# EAGLE board AJH_as3340_panel_01 (EAGLE 9.6.2)
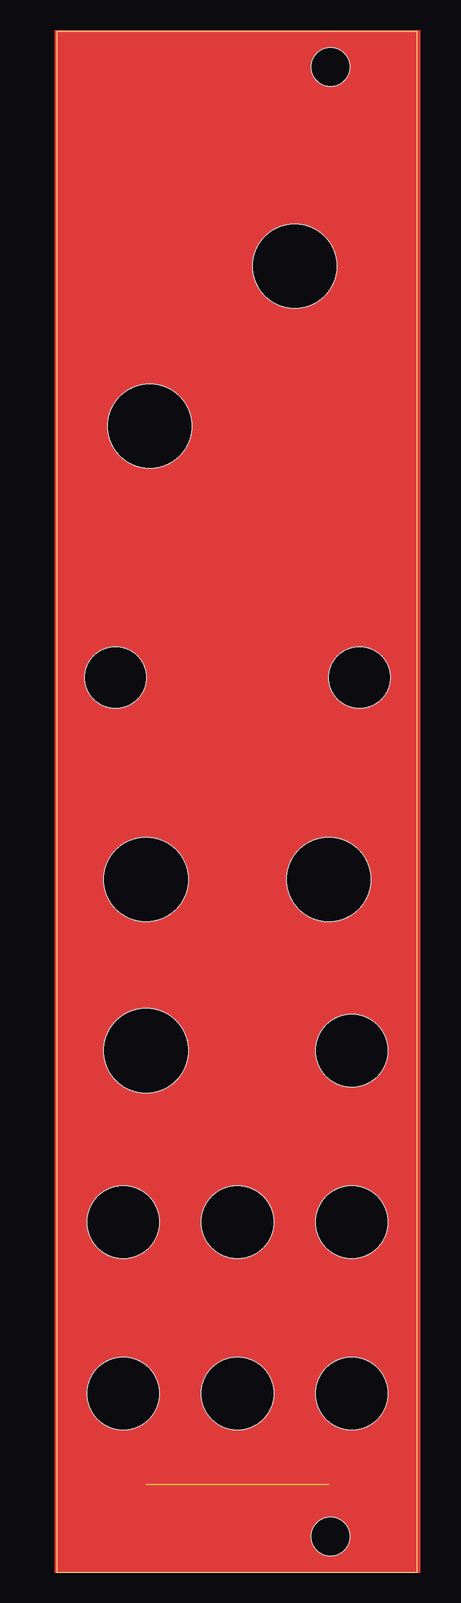
[diagram p0: board, top side]
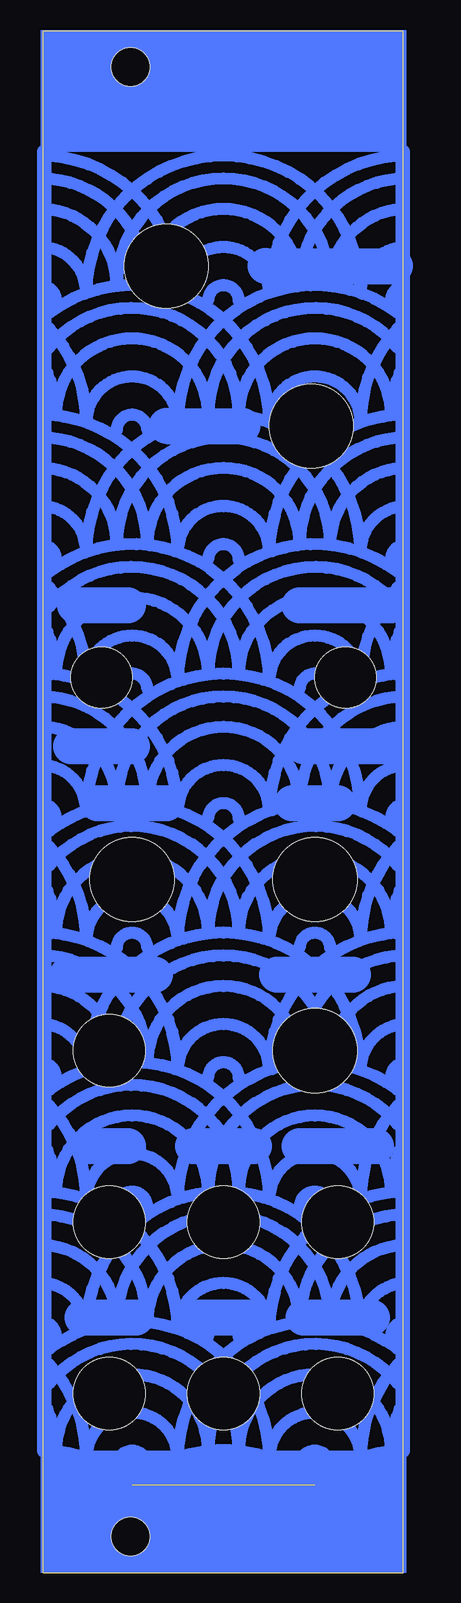
[diagram p1: board, bottom side, seen from below]

Size 30 x 128.5 mm. Coordinates in mm from the lower left corner, seen from the top.
Copper layers (1*16): Top 0.035mm / dielectric 1.5mm / Bottom 0.035mm
Design rules "default": minimum track width 6mil, minimum drill 0.35mm, track to track 6mil, track to pad 6mil, pad to pad 6mil, via to via 6mil, smd to smd 6mil, copper to edge 40mil, drill to drill 6mil, minimum pad ring 10mil, minimum via ring 8mil, stop-mask expansion 4mil, vias tented up to drill 0mil, thermal gap 10mil
Net classes: 0 default: width 0.203 mm, drill 0.203 mm, clearance 0.203 mm; 1 power: width 0.305 mm, drill 0.305 mm, clearance 0.305 mm to class 0, clearance 0.305 mm
Holes 7 mm at 19.76,108.9 7.7,95.57 22.62,57.78 7.38,57.78 7.38,43.5
Holes 5.1 mm at 25.16,74.61 4.84,74.61
Holes 6 mm at 24.52,43.5 15,29.21 24.52,29.21 5.47,29.21 24.52,14.92 15,14.92 5.47,14.92

## Footprints (pad centres in the part's own frame; a part is rotated, then mirrored left to right if it is on the bottom)
EURO_PANEL_6HP = hole 3.2: 7.5,125.5; 7.5,3

## Placement (x,y rotation side)
E$1  [EURO_PANEL_6HP]  30.24,0 0 bottom

## Library data of the parts
E$1 = eurohelper

## Tracks (layer width: path | path; a pad name or v marks a point on that pad's centre or on a via)
GND  (1 unrouted)
  Bottom 1: 0.08,10.16 arc-40 7.38,7.3 | 22.62,7.3 arc-40 29.92,10.16
  Bottom 1.2: 0.08,118.43 0.08,10.16 | 29.92,118.43 29.92,10.16
S$1
  Bottom 1: 18.81,106.68 arc-86 29.35,118.08
S$2
  Bottom 1: 21.35,107.31 arc-84 29.35,116.16
S$3
  Bottom 1: 23.89,107.31 arc-82 29.35,113.6
S$4
  Bottom 1: 26.43,95.89 arc-43 29.52,103.7
S$5
  Bottom 1: 28.97,96.52 arc-23 29.68,100
S$6
  Bottom 1: 18.81,85.09 arc-86 29.35,96.48
S$7
  Bottom 1: 23.89,85.72 arc-82 29.35,92.01
S$8
  Bottom 1: 26.43,74.3 arc-43 29.52,82.11
S$9
  Bottom 1: 28.97,74.93 arc-23 29.68,78.41
S$10
  Bottom 1: 21.35,85.72 arc-84 29.35,94.57
S$11
  Bottom 1: 11.19,95.89 arc-127 29.47,105.03
S$12
  Bottom 1: 26.43,106.68 arc-77 29.35,110.39
S$13
  Bottom 1: 0.65,118.08 arc-86 11.19,106.68
S$14
  Bottom 1: 0.65,116.16 arc-84 8.65,107.31
S$15
  Bottom 1: 0.65,113.6 arc-82 6.11,107.31
S$16
  Bottom 1: 3.57,106.68 arc-180 26.43,106.68
S$17
  Bottom 1: 6.11,107.31 arc-180 23.89,107.31
S$18
  Bottom 1: 8.65,107.31 arc-180 21.35,107.31
S$19
  Bottom 1: 11.19,106.68 arc-180 18.81,106.68
S$20
  Bottom 1: 13.73,106.05 arc-180 16.27,106.05
S$21
  Bottom 1: 13.73,96.52 arc-142 29.58,102.05
S$22
  Bottom 1: 0.32,100 arc-23 1.03,96.52
S$23
  Bottom 1: 0.48,103.7 arc-43 3.57,95.89
S$24
  Bottom 1: 0.65,110.39 arc-77 3.57,106.68
S$25
  Bottom 1: 0.65,94.57 arc-84 8.65,85.72
S$26
  Bottom 1: 0.65,92.01 arc-82 6.11,85.72
S$27
  Bottom 1: 0.65,88.8 arc-77 3.57,85.09
S$28
  Bottom 1: 0.48,82.11 arc-43 3.57,74.3
S$29
  Bottom 1: 0.32,78.41 arc-23 1.03,74.93
S$30
  Bottom 1: 0.65,96.48 arc-86 11.19,85.09
S$31
  Bottom 1: 0.53,105.03 arc-127 18.81,95.89
S$32
  Bottom 1: 0.58,107.01 arc-50 1.03,106.05
S$33
  Bottom 1: 28.97,106.05 arc-50 29.42,107.01
S$34
  Bottom 1: 26.43,85.09 arc-77 29.35,88.8
S$35
  Bottom 1: 28.97,84.45 arc-50 29.42,85.42
S$36
  Bottom 1: 11.19,74.3 arc-127 29.47,83.44
S$37
  Bottom 1: 13.73,74.93 arc-142 29.58,80.46
S$38
  Bottom 1: 18.81,63.5 arc-86 29.35,74.89
S$39
  Bottom 1: 21.35,64.14 arc-84 29.35,72.98
S$40
  Bottom 1: 23.89,64.14 arc-82 29.35,70.42
S$41
  Bottom 1: 26.43,63.5 arc-77 29.35,67.21
S$42
  Bottom 1: 26.43,52.7 arc-43 29.52,60.52
S$43
  Bottom 1: 28.97,53.34 arc-23 29.68,56.82
S$44
  Bottom 1: 18.81,41.91 arc-86 29.35,53.3
S$45
  Bottom 1: 23.89,42.55 arc-82 29.35,48.83
S$46
  Bottom 1: 26.43,41.91 arc-77 29.35,45.62
S$47
  Bottom 1: 28.97,31.75 arc-23 29.68,35.23
S$48
  Bottom 1: 26.43,31.11 arc-43 29.52,38.93
S$49
  Bottom 1: 21.35,42.55 arc-84 29.35,51.39
S$50
  Bottom 1: 11.19,52.7 arc-127 29.47,61.85
S$51
  Bottom 1: 13.73,53.34 arc-142 29.58,58.87
S$52
  Bottom 1: 28.97,62.87 arc-50 29.42,63.83
S$53
  Bottom 1: 11.19,31.11 arc-127 29.47,40.27
S$54
  Bottom 1: 23.89,20.95 arc-82 29.35,27.24
S$55
  Bottom 1: 26.43,20.32 arc-77 29.35,24.03
S$56
  Bottom 1: 26.43,9.53 arc-43 29.52,17.34
S$57
  Bottom 1: 28.97,10.16 arc-23 29.68,13.64
S$58
  Bottom 1: 21.35,20.95 arc-84 29.35,29.8
S$59
  Bottom 1: 18.81,20.32 arc-86 29.35,31.71
S$60
  Bottom 1: 13.73,31.75 arc-142 29.58,37.28
S$61
  Bottom 1: 28.97,41.27 arc-50 29.42,42.24
S$62
  Bottom 1: 11.19,9.53 arc-127 29.47,18.68
S$63
  Bottom 1: 13.73,10.16 arc-142 29.58,15.69
S$64
  Bottom 1: 28.97,19.68 arc-50 29.42,20.65
S$65
  Bottom 1: 21.35,8.89 arc-180 23.89,8.89
S$66
  Bottom 1: 18.81,9.53 arc-180 26.43,9.53
S$67
  Bottom 1: 16.27,10.16 arc-180 28.97,10.16
S$68
  Bottom 1: 1.03,10.16 arc-180 13.73,10.16
S$69
  Bottom 1: 0.42,15.69 arc-142 16.27,10.16
S$70
  Bottom 1: 0.53,18.68 arc-127 18.81,9.53
S$71
  Bottom 1: 0.65,27.24 arc-82 6.11,20.95
S$72
  Bottom 1: 6.11,20.95 arc-180 23.89,20.95
S$73
  Bottom 1: 1.03,31.75 arc-180 13.73,31.75
S$74
  Bottom 1: 11.19,20.32 arc-180 18.81,20.32
S$75
  Bottom 1: 13.73,19.68 arc-180 16.27,19.68
S$76
  Bottom 1: 3.57,9.53 arc-180 11.19,9.53
S$77
  Bottom 1: 6.11,8.89 arc-180 8.65,8.89
S$80
  Bottom 1: 7.38,7.3 arc-83 22.62,7.3
S$81
  Bottom 1: 16.27,31.75 arc-180 28.97,31.75
S$82
  Bottom 1: 18.81,31.11 arc-180 26.43,31.11
S$83
  Bottom 1: 21.35,30.48 arc-180 23.89,30.48
S$84
  Bottom 1: 0.65,51.39 arc-84 8.65,42.55
S$85
  Bottom 1: 3.57,41.91 arc-180 26.43,41.91
S$86
  Bottom 1: 6.11,42.55 arc-180 23.89,42.55
S$87
  Bottom 1: 8.65,42.55 arc-180 21.35,42.55
S$88
  Bottom 1: 11.19,41.91 arc-180 18.81,41.91
S$89
  Bottom 1: 0.42,80.46 arc-142 16.27,74.93
S$90
  Bottom 1: 11.19,85.09 arc-180 18.81,85.09
S$91
  Bottom 1: 8.65,85.72 arc-180 21.35,85.72
S$92
  Bottom 1: 6.11,85.72 arc-180 23.89,85.72
S$93
  Bottom 1: 18.81,95.89 arc-180 26.43,95.89
S$94
  Bottom 1: 21.35,95.25 arc-180 23.89,95.25
S$95
  Bottom 1: 16.27,96.52 arc-180 28.97,96.52
S$96
  Bottom 1: 1.03,96.52 arc-180 13.73,96.52
S$97
  Bottom 1: 0.42,102.05 arc-142 16.27,96.52
S$98
  Bottom 1: 3.57,95.89 arc-180 11.19,95.89
S$99
  Bottom 1: 6.11,95.25 arc-180 8.65,95.25
S$100
  Bottom 1: 3.57,85.09 arc-180 26.43,85.09
S$101
  Bottom 1: 13.73,84.45 arc-180 16.27,84.45
S$102
  Bottom 1: 1.03,74.93 arc-180 13.73,74.93
S$103
  Bottom 1: 3.57,74.3 arc-180 11.19,74.3
S$104
  Bottom 1: 6.11,73.66 arc-180 8.65,73.66
S$105
  Bottom 1: 3.57,63.5 arc-180 26.43,63.5
S$106
  Bottom 1: 6.11,64.14 arc-180 23.89,64.14
S$107
  Bottom 1: 8.65,64.14 arc-180 21.35,64.14
S$108
  Bottom 1: 11.19,63.5 arc-180 18.81,63.5
S$109
  Bottom 1: 13.73,62.87 arc-180 16.27,62.87
S$110
  Bottom 1: 16.27,74.93 arc-180 28.97,74.93
S$111
  Bottom 1: 18.81,74.3 arc-180 26.43,74.3
S$112
  Bottom 1: 21.35,73.66 arc-180 23.89,73.66
S$113
  Bottom 1: 0.53,83.44 arc-127 18.81,74.3
S$114
  Bottom 1: 0.58,85.42 arc-50 1.03,84.45
S$115
  Bottom 1: 0.65,72.98 arc-84 8.65,64.14
S$116
  Bottom 1: 0.65,70.42 arc-82 6.11,64.14
S$117
  Bottom 1: 0.65,67.21 arc-77 3.57,63.5
S$118
  Bottom 1: 0.65,74.89 arc-86 11.19,63.5
S$119
  Bottom 1: 0.48,60.52 arc-43 3.57,52.7
S$120
  Bottom 1: 0.32,56.82 arc-23 1.03,53.34
S$121
  Bottom 1: 0.53,61.85 arc-127 18.81,52.7
S$122
  Bottom 1: 0.42,58.87 arc-142 16.27,53.34
S$123
  Bottom 1: 0.65,53.3 arc-86 11.19,41.91
S$124
  Bottom 1: 0.32,13.64 arc-23 1.03,10.16
S$125
  Bottom 1: 0.48,17.34 arc-43 3.57,9.53
S$126
  Bottom 1: 0.58,20.65 arc-50 1.03,19.68
S$127
  Bottom 1: 0.65,24.03 arc-77 3.57,20.32
S$128
  Bottom 1: 0.65,31.71 arc-86 11.19,20.32
S$129
  Bottom 1: 0.53,40.27 arc-127 18.81,31.11
S$130
  Bottom 1: 0.42,37.28 arc-142 16.27,31.75
S$131
  Bottom 1: 0.48,38.93 arc-43 3.57,31.11
S$132
  Bottom 1: 0.32,35.23 arc-23 1.03,31.75
S$133
  Bottom 1: 0.65,48.83 arc-82 6.11,42.55
S$134
  Bottom 1: 0.58,63.83 arc-50 1.03,62.87
S$135
  Bottom 1: 1.03,53.34 arc-180 13.73,53.34
S$136
  Bottom 1: 3.57,52.7 arc-180 11.19,52.7
S$137
  Bottom 1: 6.11,52.07 arc-180 8.65,52.07
S$138
  Bottom 1: 18.81,52.7 arc-180 26.43,52.7
S$139
  Bottom 1: 16.27,53.34 arc-180 28.97,53.34
S$140
  Bottom 1: 21.35,52.07 arc-180 23.89,52.07
S$141
  Bottom 1: 13.73,41.27 arc-180 16.27,41.27
S$142
  Bottom 1: 0.65,45.62 arc-77 3.57,41.91
S$143
  Bottom 1: 0.58,42.24 arc-50 1.03,41.27
S$144
  Bottom 1: 0.65,29.8 arc-84 8.65,20.95
S$145
  Bottom 1: 3.57,31.11 arc-180 11.19,31.11
S$146
  Bottom 1: 8.65,20.95 arc-180 21.35,20.95
S$147
  Bottom 1: 3.57,20.32 arc-180 26.43,20.32
S$148
  Bottom 1: 6.11,30.48 arc-180 8.65,30.48
S$149
  Bottom 3: 11.51,108.9 0.71,108.9
S$150
  Bottom 3: 19.76,95.57 13.41,95.57
S$151
  Bottom 3: 27.38,80.64 22.94,80.64
S$152
  Bottom 3: 8.65,80.64 1.03,80.64
S$153
  Bottom 3: 26.75,21.27 22.3,21.27
S$154
  Bottom 3: 17.86,21.27 12.14,21.27
S$155
  Bottom 3: 8.33,21.27 2.62,21.27
S$156
  Bottom 3: 26.11,35.56 22.94,35.56
S$157
  Bottom 3: 17.54,35.56 12.46,35.56
S$158
  Bottom 3: 8.65,35.56 2.3,35.56
S$159
  Bottom 3: 28.02,49.85 20.71,49.85
S$160
  Bottom 3: 10.55,49.85 4.2,49.85
S$161
  Bottom 3: 25.48,64.14 19.76,64.14
S$162
  Bottom 3: 9.29,64.14 5.47,64.14
S$163
  Bottom 3: 27.7,68.9 22.62,68.9
S$164
  Bottom 3: 8.33,68.9 1.35,68.9
S$165
  Bottom 3: 8.65,80.64 1.03,80.64
S$166
  Bottom 3: 27.38,80.64 22.94,80.64
(copper drawn outside any net)
  shapes: Bottom area x2, Top area x1

## Text on the board
bStop: Forest Caver's | AS3340 VCO | TUNE | FINE | HARD | LIN | SOFT | EXP | PW | MOD | PWM | SYNC | PWM | V/O | FM | SAW | SQR | TRI | dr.Chungus